# Altium PCB Razvodka.PcbDoc
Units mm, origin at the board's own origin, x right, y up, seen from the top; angles counter-clockwise.
Board outline 149 x 82 mm, 2 copper layers (Top Layer, Bottom Layer); 58 components, 57 nets, 181 pads, 0 vias.
Unrouted connection lines stored in the file: 1.
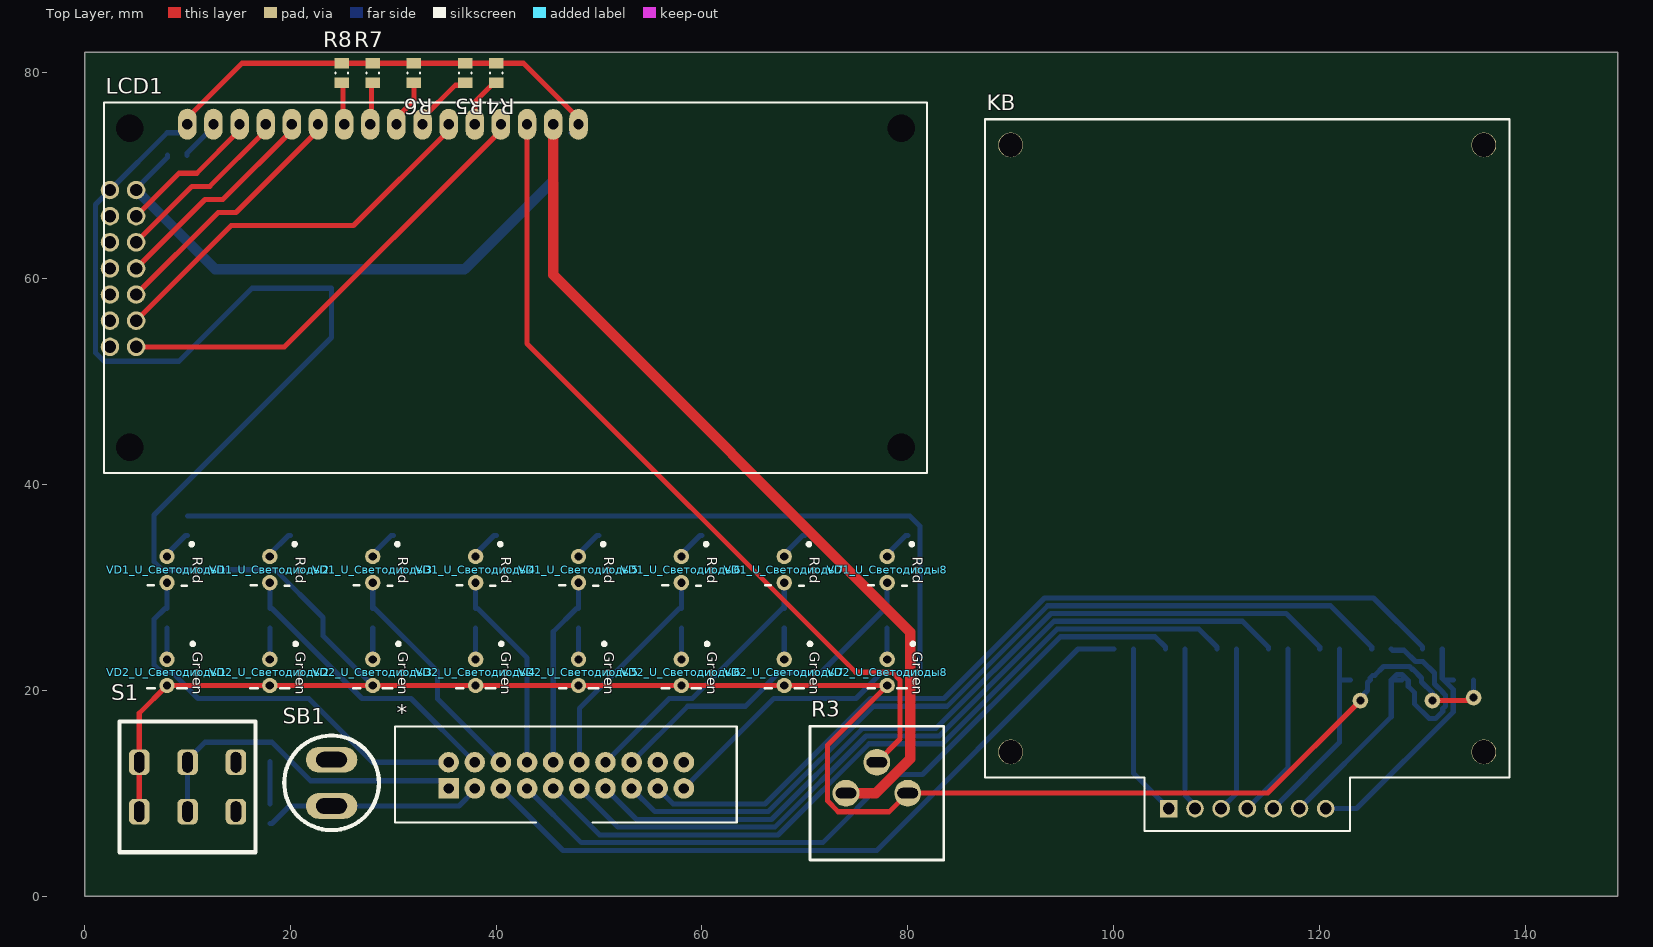
[diagram p0: Top Layer view]
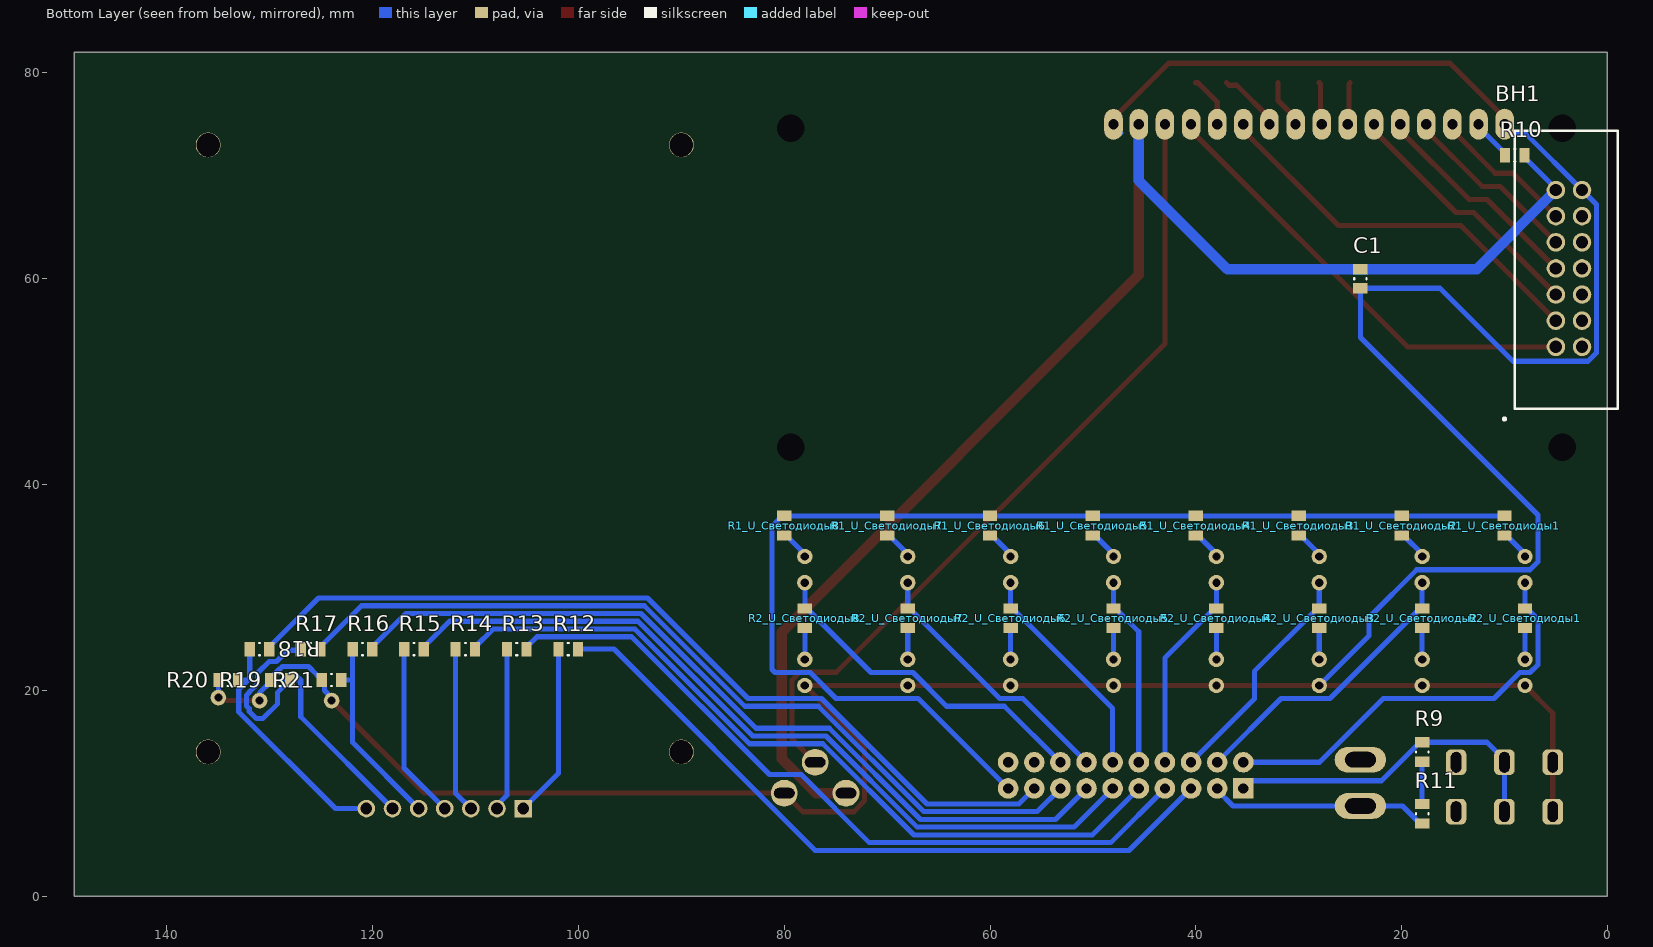
[diagram p1: Bottom Layer view, seen from below]
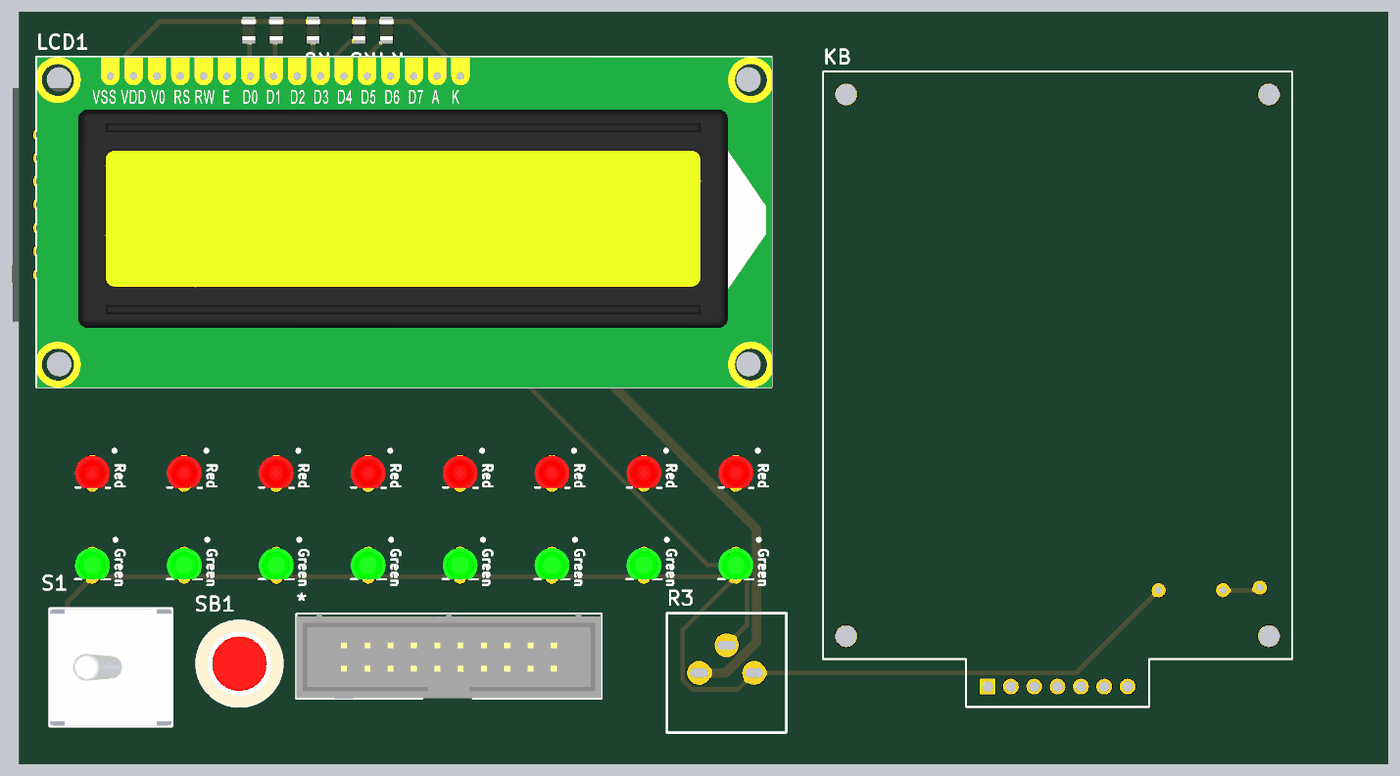
[diagram p2: 3D render of the assembled board from above, using the file's embedded part models]
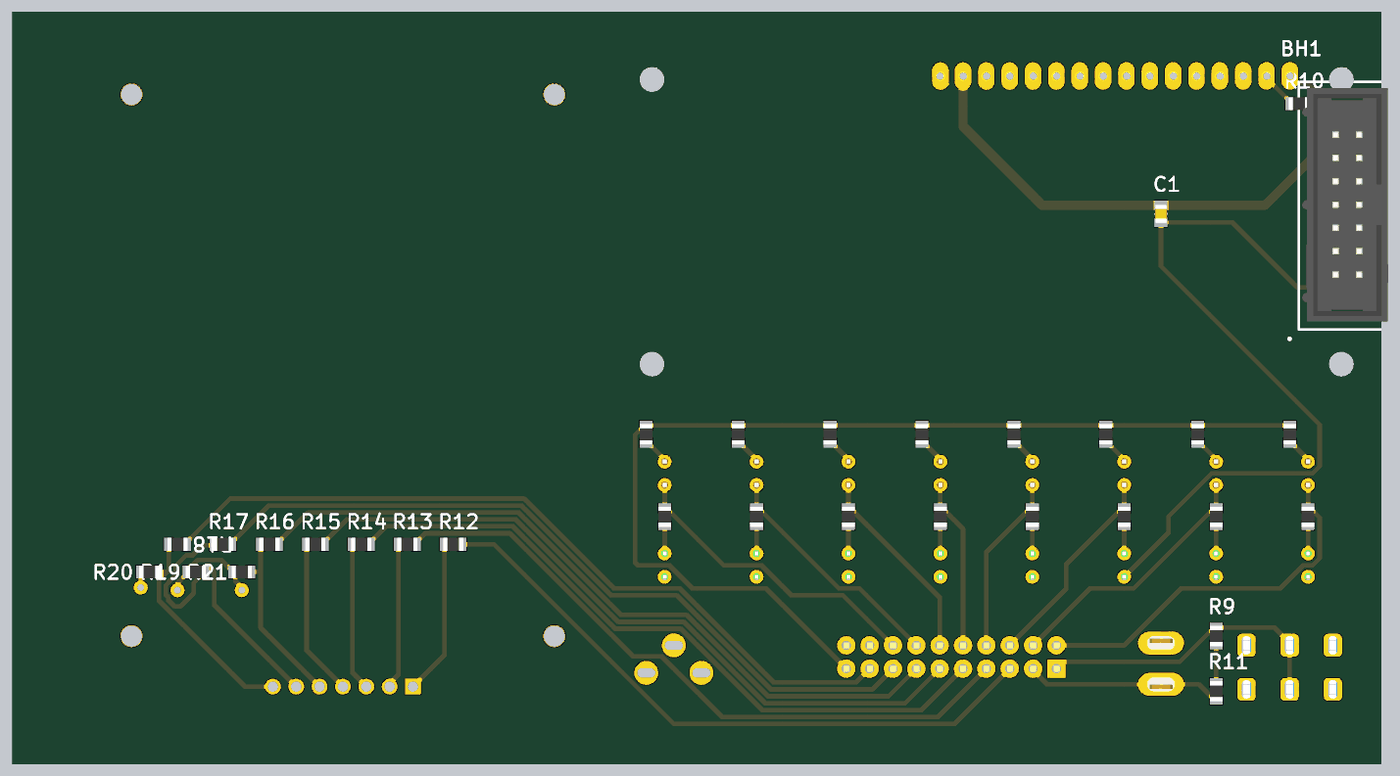
[diagram p3: 3D render of the assembled board from below, using the file's embedded part models]

## Layer stack, top to bottom
Top Solder: solder mask 0.0102, Solder Resist, Dk 3.5
Top Layer: signal copper 0.0356
Dielectric 1: dielectric 0.32, FR-4, Dk 4.8
Bottom Layer: signal copper 0.0356
Bottom Solder: solder mask 0.0102, Solder Resist, Dk 3.5

## Board outline
0,0 0,82 149,82 149,0

## Design rules (kind name [scope] priority, off if disabled: settings)
Clearance [All] p1: gap=0.254 ignorepadtopadclearanceinfootprint=FALSE except(0: Arc-Hole Track-Hole SMDPad-Hole THPad-Hole Via-Hole Fill-Hole Poly-Hole Region-Hole Text-Hole)
Height [All] p1: minheight=0 maxheight=50 prefheight=5
PolygonConnect [All] p1: connectstyle=Relief reliefconductorwidth=0.254 reliefentries=4 polygonreliefangle="90 Angle" airgapwidth=0.254
RoutingVias [All] p1: holewidth=0.711 width=1.27 viastyle="Through Hole" minholewidth=0.711 minwidth=1.27 maxholewidth=0.711 maxwidth=1.27
SolderMaskExpansion [All] p1: expansion=0.102 istentingtop=FALSE
Width [All] p1: maxlimit=1 minlimit=0.254 preferedwidth=0.5 minimp=50.000000 maximp=50.000000 favimp=50.000000
29 further rules are at their usual default settings.

## Classes and differential pairs
channel class Светодиоды: U_Светодиоды1 U_Светодиоды2 U_Светодиоды3 U_Светодиоды4 U_Светодиоды5 U_Светодиоды6 U_Светодиоды7 U_Светодиоды8
component class "Управление (дисплей+клавиатура)": BH1 C1 KB R3 R4 R5 R6 R7 R8 R9 R10 R11 R12 R13 R14 R15 R16 R17 R18 R19 R20 R21 S1 SB1
component class U_Светодиоды8: R1_U_Светодиоды8 R2_U_Светодиоды8 VD1_U_Светодиоды8 VD2_U_Светодиоды8
component class U_Светодиоды7: R1_U_Светодиоды7 R2_U_Светодиоды7 VD1_U_Светодиоды7 VD2_U_Светодиоды7
component class U_Светодиоды6: R1_U_Светодиоды6 R2_U_Светодиоды6 VD1_U_Светодиоды6 VD2_U_Светодиоды6
component class U_Светодиоды5: R1_U_Светодиоды5 R2_U_Светодиоды5 VD1_U_Светодиоды5 VD2_U_Светодиоды5
component class U_Светодиоды4: R1_U_Светодиоды4 R2_U_Светодиоды4 VD1_U_Светодиоды4 VD2_U_Светодиоды4
component class U_Светодиоды3: R1_U_Светодиоды3 R2_U_Светодиоды3 VD1_U_Светодиоды3 VD2_U_Светодиоды3
component class U_Светодиоды2: R1_U_Светодиоды2 R2_U_Светодиоды2 VD1_U_Светодиоды2 VD2_U_Светодиоды2
component class U_Светодиоды1: R1_U_Светодиоды1 R2_U_Светодиоды1 VD1_U_Светодиоды1 VD2_U_Светодиоды1

## Components (designator, comment, footprint, x,y, rotation, side; value= is the part's Value field where it differs from the comment)
* "BH20" IDC20 45.921,15.286 r90 top
BH1 "BH14(1)" "BH-14 (DS1013-14S) (IDC-14MS)" 5,53.38 r90 bottom
C1 "*" C(ceramic) 24,60 r90 bottom
KB "AK-304" AK-304-N-BBW 113,43.5 r0 top
LCD1 "BCB1602" BCB1602 4.38,43.624 r0 top
R1_U_Светодиоды1 "R" R 10,36 r90 bottom (schematic designator R1)
R1_U_Светодиоды2 "R" R 20,36 r90 bottom (schematic designator R1)
R1_U_Светодиоды3 "R" R 30,36 r90 bottom (schematic designator R1)
R1_U_Светодиоды4 "R" R 40,36 r90 bottom (schematic designator R1)
R1_U_Светодиоды5 "R" R 50,36 r90 bottom (schematic designator R1)
R1_U_Светодиоды6 "R" R 60,36 r90 bottom (schematic designator R1)
R1_U_Светодиоды7 "R" R 70,36 r90 bottom (schematic designator R1)
R1_U_Светодиоды8 "R" R 80,36 r90 bottom (schematic designator R1)
R2_U_Светодиоды1 "R" R 8,27 r90 bottom (schematic designator R2)
R2_U_Светодиоды2 "R" R 18,27 r90 bottom (schematic designator R2)
R2_U_Светодиоды3 "R" R 28,27 r90 bottom (schematic designator R2)
R2_U_Светодиоды4 "R" R 38,27 r90 bottom (schematic designator R2)
R2_U_Светодиоды5 "R" R 48,27 r90 bottom (schematic designator R2)
R2_U_Светодиоды6 "R" R 58,27 r90 bottom (schematic designator R2)
R2_U_Светодиоды7 "R" R 68,27 r90 bottom (schematic designator R2)
R2_U_Светодиоды8 "R" R 78,27 r90 bottom (schematic designator R2)
R3 "" R(подстр) 77,10 r0 top
R4 "*" R 40,80 r90 top
R5 "*" R 37,80 r90 top
R6 "*" R 32,80 r90 top
R7 "*" R 28,80 r90 top
R8 "*" R 25,80 r90 top
R9 "R" R 18,14 r90 bottom
R10 "*" R 9,72 r180 bottom
R11 "*" R 18,8 r270 bottom
R12 "R" R 101,24 r0 bottom
R13 "R" R 106,24 r0 bottom
R14 "R" R 111,24 r0 bottom
R15 "R" R 116,24 r0 bottom
R16 "R" R 121,24 r0 bottom
R17 "R" R 126.05,24 r0 bottom
R18 "R" R 131,24 r0 bottom
R19 "R" R 129,21 r180 bottom
R20 "R" R 134.05,21 r180 bottom
R21 "R" R 124,21 r180 bottom
S1 "(?)тумблер" MTS-2 10,10.6 r90 top
SB1 "ПУСК" кнопка 24,11 r0 top
VD1_U_Светодиоды1 "L-934(RED)" L-934(RED) 8,33 r270 top (schematic designator VD1)
VD1_U_Светодиоды2 "L-934(RED)" L-934(RED) 18,33 r270 top (schematic designator VD1)
VD1_U_Светодиоды3 "L-934(RED)" L-934(RED) 28,33 r270 top (schematic designator VD1)
VD1_U_Светодиоды4 "L-934(RED)" L-934(RED) 38,33 r270 top (schematic designator VD1)
VD1_U_Светодиоды5 "L-934(RED)" L-934(RED) 48,33 r270 top (schematic designator VD1)
VD1_U_Светодиоды6 "L-934(RED)" L-934(RED) 58,33 r270 top (schematic designator VD1)
VD1_U_Светодиоды7 "L-934(RED)" L-934(RED) 68,33 r270 top (schematic designator VD1)
VD1_U_Светодиоды8 "L-934(RED)" L-934(RED) 78,33 r270 top (schematic designator VD1)
VD2_U_Светодиоды1 "L-934(GREEN)" L-934(GREEN) 8,23 r270 top (schematic designator VD2)
VD2_U_Светодиоды2 "L-934(GREEN)" L-934(GREEN) 18,23 r270 top (schematic designator VD2)
VD2_U_Светодиоды3 "L-934(GREEN)" L-934(GREEN) 28,23 r270 top (schematic designator VD2)
VD2_U_Светодиоды4 "L-934(GREEN)" L-934(GREEN) 38,23 r270 top (schematic designator VD2)
VD2_U_Светодиоды5 "L-934(GREEN)" L-934(GREEN) 48,23 r270 top (schematic designator VD2)
VD2_U_Светодиоды6 "L-934(GREEN)" L-934(GREEN) 58,23 r270 top (schematic designator VD2)
VD2_U_Светодиоды7 "L-934(GREEN)" L-934(GREEN) 68,23 r270 top (schematic designator VD2)
VD2_U_Светодиоды8 "L-934(GREEN)" L-934(GREEN) 78,23 r270 top (schematic designator VD2)

## Footprints (in the part's own frame and the unit in brackets; to place one, negate y for a bottom-side part, rotate by r counter-clockwise, add the part's x,y. Pads: shape width x height; smd on the part's side, far side on the other; paste and mask are expansions set on the pad)
AK-304-N-BBW [mm]
  rect 1.71x1.71 hole 1.14: 1(-7.62,-35)
  round 1.71 hole 1.14: 2(-5.08,-35) 3(-2.54,-35) 4(0,-35) 5(2.54,-35) 6(5.08,-35) 7(7.62,-35)
  round 2.4 hole 2.3 unplated: ""(-23,-29.5) ""(-23,29.5) ""(23,-29.5) ""(23,29.5)
  silkscreen extent -25.5,-37.2 25.5,32
BCB1602 [mm]
  oval 1.8x3 hole 1: 1(43.62,31.376) 2(41.16,31.377) 3(38.62,31.379) 4(36.08,31.381) 5(33.54,31.382) 6(31,31.384) 7(28.46,31.385) 8(25.92,31.387) 9(23.38,31.389) 10(20.84,31.39) 11(18.3,31.392) 12(15.76,31.394) 13(13.22,31.395) 14(10.68,31.397) 15(8.14,31.398) 16(5.6,31.4)
  round 2.5 hole 2.7 unplated: *(0,0) *(0,31) *(75,0) *(75,31)
  silkscreen extent -2.5,-2.5 77.5,33.5, body extent -2.43,-2.55 77.57,33.45, height 17.05
"BH-14 (DS1013-14S) (IDC-14MS)" [mm]
  round 1.8 hole 1.2: 1(0,0) 2(2.54,0) 3(5.08,0) 4(7.62,0) 5(10.16,0) 6(12.7,0) 7(15.24,0) 8(0,-2.54) 9(2.54,-2.54) 10(5.08,-2.54) 11(7.62,-2.54) 12(10.16,-2.54) 13(12.7,-2.54) 14(15.24,-2.54)
  silkscreen extent -7.12,-6 21,5.13, body extent -5.1,-5.7 20.3,3.65, height 10.25
C(ceramic) [mm] "Chip Capacitor, 2-Leads, Body 2,00x1,25mm, IPC Medium Density"
  rect 1x1.4 smd: 1(-0.925,0) 2(0.925,0)
  silkscreen extent -0.05,-0.6 0.05,0.6, body extent -1,-0.63 1,0.63, height 1.3
IDC20 [mm]
  rect 2x2 hole 1: 1(-4.826,10.541)
  round 2 hole 1: 2(-4.826,8.001) 3(-4.826,5.461) 4(-4.826,2.921) 5(-4.826,0.381) 6(-4.826,-2.159) 7(-4.826,-4.699) 8(-4.826,-7.239) 9(-4.826,-9.779) 10(-4.826,-12.319) 11(-2.286,10.541) 12(-2.286,8.001) 13(-2.286,5.461) 14(-2.286,2.921) 15(-2.286,0.381) 16(-2.286,-2.159) 17(-2.286,-4.699) 18(-2.286,-7.239) 19(-2.286,-9.779) 20(-2.286,-12.319)
  silkscreen extent -8.13,-17.46 1.17,15.74, body extent -8.13,-17.46 1.17,15.74, height 9.1
L-934(GREEN) [mm]
  round 1.5 hole 0.8: 1(0,0) 2(2.54,0)
  silkscreen extent -1.64,-1.89 2.81,2.64, body extent -0.61,-1.9 2.81,1.9, height 5.64
L-934(RED) [mm]
  round 1.5 hole 0.8: 1(0,0) 2(2.54,0)
  silkscreen extent -1.34,-1.85 2.85,2.54, body extent -0.65,-1.9 2.85,1.9, height 6
MTS-2 [mm]
  rrect50% 2.5x2 hole 1 slot 2 at 0 deg: 1(-2.4,4.7) 1(2.4,4.7) 2(-2.4,0) 2(2.4,0) 3(-2.4,-4.7) 3(2.4,-4.7)
  silkscreen extent -6.35,-6.6 6.35,6.6, body extent -6.35,-6.6 6.35,6.6, height 29.34
R [mm] "Chip Resistor, 2-Leads, Body 2,10x1,30mm, IPC Medium Density"
  rect 1x1.4 smd: 1(-0.95,0) 2(0.95,0)
  silkscreen extent -0.05,-0.6 0.05,0.6, body extent -1.1,-0.7 1.1,0.7, height 0.6
R(подстр) [mm]
  round 2.6 hole 1 slot 2 at 0 deg: 1(-3,0) 2(3,0) 3(0,3)
  silkscreen extent -6.5,-6.5 6.5,6.5, body extent -6.5,-6.3 6.3,6.5, height 6
кнопка [mm]
  oval 5x2.5 hole 1.5 slot 3 at 0 deg: 1(0,2.25) 2(0,-2.25)
  silkscreen extent -4.6,-4.6 4.6,4.6, body extent -4.75,-4.75 4.75,4.75, height 22.6

## Part data
BH1: library part BH14(3)
C1: library part C(ceramic)
R3: library part R(подстр)
R4 R5 R6 R7 R8 R10 R11: library part R
SB1: library part кнопка

## Free pads (board coordinates)
  round 1.524 hole 0.762: 5(124,19) 6(131,19) 7(135,19.293)

## Nets (pads, with @x,y where several pads share a name; then routed paths per layer and width w, separated by ;. In a path a pad name is that pad's centre, name@x,y a point inside that pad or via, vN(x,y) a via of type N, cw(c..) or ccw(c..) an arc to the next point about the centre after c; other vN are vias at no path point)
+3.3: R9.1 R11.1 | length 4.1
  Bottom Layer w0.5: R11.1@18,8.963 R9.1
+5: BH1.7 C1.2 LCD1.2 R3.1 R10.2 | length 141.1
  Top Layer w1: LCD1.2 45.54,60.374 80.258,25.656 80.258,13.353 76.905,10 R3.1
  Bottom Layer w0.5: BH1.7 5,68.75 8.05,71.8 R10.2
  Bottom Layer w1: BH1.7 12.695,60.925 C1.2 36.925,60.925 45.54,69.54 LCD1.2
GND: BH1.14 C1.1 LCD1.1 LCD1.16 pad.5 pad.6 pad.7 R3.2 R4.2 R5.2 R6.2 R7.2 R8.2 R19.1 R20.1 R21.1 S1.1 SB1.1 VD2_U_Светодиоды1.2 VD2_U_Светодиоды2.2 VD2_U_Светодиоды3.2 VD2_U_Светодиоды4.2 VD2_U_Светодиоды5.2 VD2_U_Светодиоды6.2 VD2_U_Светодиоды7.2 VD2_U_Светодиоды8.2 | length 331.4
  Top Layer w0.5: S1.1@5.3,8.2 5.3,13 5.3,17.76 VD2_U_Светодиоды1.2 VD2_U_Светодиоды2.2 VD2_U_Светодиоды3.2 VD2_U_Светодиоды4.2 VD2_U_Светодиоды5.2 VD2_U_Светодиоды6.2 VD2_U_Светодиоды7.2 VD2_U_Светодиоды8.2 72.196,14.656 72.196,9.253 73.253,8.196 78.196,8.196 R3.2 115,10 pad.5 ; LCD1.16@9.446,74.49 LCD1.16 9.98,75.624 15.306,80.95 R8.2 R7.2 R6.2 R5.2 R4.2 42.65,80.95 48,75.6 LCD1.1 ; pad.6 134.707,19 pad.7
  Bottom Layer w0.5: LCD1.16@9.98,75.624 LCD1.16 9.98,74.793 9.379,74.193 8.033,74.193 BH1.14 1.056,67.216 1.056,52.798 1.878,51.976 9.165,51.976 16.264,59.075 C1.1 24,54.28 6.746,37.026 6.746,32.481 7.513,31.714 18.519,31.714 23.164,27.069 23.164,25.296 VD2_U_Светодиоды3.2 ; LCD1.1@47.301,74.151 47.399,74.151 48,74.752 LCD1.1 LCD1.1@48,75.6 ; pad.5 124,19.277 124.7,19.977 124.7,20.75 R21.1 124.95,21.2 125.2,21.45 125.4,21.45 126.246,22.296 128.775,22.296 129.029,22.042 129.108,22.042 129.95,21.2 R19.1 129.95,20.8 131,19.75 pad.6 ; pad.7 R20.1
Net*_1: *.1 R9.2 S1.2 | length 33
  Bottom Layer w0.5: S1.2@10,8.2 10,13 10,13.25 11.7,14.95 R9.2 18.2,14.95 21.94,11.21 34.63,11.21 *.1
Net*_2: *.2 R11.2 SB1.2 | length 21.4
  Bottom Layer w0.5: R11.2 18.2,7.05 19.9,8.75 SB1.2 36.383,8.75 37.92,10.287 *.2
Net*_3: *.3 R12.1 | length 70.2
  Bottom Layer w0.5: *.3 46.488,4.432 76.983,4.432 96.551,24 R12.1
Net*_4: *.4 R13.1 | length 73.1
  Bottom Layer w0.5: *.4 48.274,5.186 71.737,5.186 78.355,11.804 81.449,11.804 94.849,25.204 104.046,25.204 105.05,24.2 R13.1
Net*_5: *.5 R14.1 | length 75.6
  Bottom Layer w0.5: *.5 50.06,5.94 67.389,5.94 76.253,14.804 83.383,14.804 94.537,25.958 108.292,25.958 110.05,24.2 R14.1
Net*_6: *.6 R15.1 | length 78.1
  Bottom Layer w0.5: *.6 51.846,6.694 67.076,6.694 75.941,15.558 83.07,15.558 94.224,26.712 112.538,26.712 115.05,24.2 R15.1
Net*_7: *.7 R16.1 | length 80.5
  Bottom Layer w0.5: *.7 53.632,7.448 66.764,7.448 75.628,16.312 82.758,16.312 93.912,27.466 116.784,27.466 120.05,24.2 R16.1
Net*_8: *.8 R17.1 | length 83
  Bottom Layer w0.5: *.8 55.418,8.202 66.452,8.202 76.702,18.452 83.832,18.452 93.6,28.22 121.08,28.22 125.1,24.2 R17.1
Net*_9: *.9 R18.1 | length 85.4
  Bottom Layer w0.5: *.9 57.204,8.956 66.14,8.956 76.39,19.206 83.519,19.206 93.287,28.974 125.276,28.974 130.05,24.2 R18.1
NetBH1_1: BH1.1 LCD1.4 | length 44.8
  Top Layer w0.5: BH1.1 19.435,53.38 40.46,74.405 LCD1.4
NetBH1_2: BH1.2 LCD1.6 | length 38.6
  Top Layer w0.5: BH1.2 14.244,65.164 26.136,65.164 35.38,74.408 LCD1.6
NetBH1_3: BH1.3 LCD1.11 | length 24.9
  Top Layer w0.5: BH1.3 12.978,66.438 14.702,66.438 22.68,74.416 LCD1.11
NetBH1_4: BH1.4 LCD1.12 | length 21.3
  Top Layer w0.5: BH1.4 11.709,67.709 13.431,67.709 20.14,74.418 LCD1.12
NetBH1_5: BH1.5 LCD1.13 | length 17.7
  Top Layer w0.5: BH1.5 10.44,68.98 12.16,68.98 17.6,74.419 LCD1.13
NetBH1_6: BH1.6 LCD1.14 | length 14.1
  Top Layer w0.5: BH1.6 9.17,70.25 10.89,70.25 15.06,74.421 LCD1.14
NetKB_1: KB.1 R12.2 | length 16.9
  Bottom Layer w0.5: R12.2 101.95,11.93 KB.1
NetKB_2: KB.2 R13.2 | length 15.9
  Bottom Layer w0.5: R13.2 106.95,9.797 107.92,8.827 KB.2
NetKB_3: KB.3 R14.2 | length 16.1
  Bottom Layer w0.5: KB.3 111.95,9.99 R14.2
NetKB_4: KB.4 R15.2 | length 17.1
  Bottom Layer w0.5: KB.4 116.95,12.45 R15.2
NetKB_5: KB.5 R16.2 R21.2 | length 19.3
  Bottom Layer w0.5: KB.5 121.95,14.91 121.95,21 ; R16.2 121.95,21 ; R21.2 121.95,21
NetKB_6: KB.6 R17.2 R19.2 | length 35
  Bottom Layer w0.5: KB.6 127,17.42 127,21 ; R17.2 127.113,23.887 128.25,23.887 129.341,22.796 130.067,22.796 131.196,21.667 131.196,20.62 132,19.816 132,19.79 132.266,19.524 132.266,18.476 132,18.21 132,17.934 131.312,17.246 130.688,17.246 129.241,18.692 129.241,19.796 128.646,20.392 128.646,20.946 128.05,21.542 127.542,21.542 127,21 ; R19.2 127,21
NetKB_7: KB.7 R18.2 R20.2 | length 23.8
  Bottom Layer w0.5: KB.7 123.633,8.5 133.02,17.887 133.02,20.063 131.95,21.133 R18.2 ; 132.083,21 R20.2@133.05,21
NetLCD1_3: LCD1.3 R3.3 | length 80
  Top Layer w0.5: LCD1.3 43,53.687 74.941,21.746 78.487,21.746 79.254,20.979 79.254,15.254 R3.3
NetLCD1_5: LCD1.5 R4.1 | length 5.6
  Top Layer w0.5: LCD1.5 37.92,77.17 39.8,79.05 R4.1
  Bottom Layer w0.5: LCD1.5@37.92,74.406 LCD1.5
NetLCD1_7: LCD1.7 R5.1 | length 6.3
  Top Layer w0.5: LCD1.7 32.84,75.61 36.03,78.8 36.75,78.8 R5.1
  Bottom Layer w0.5: LCD1.7 LCD1.7@32.92,74.93
NetLCD1_8: LCD1.8 R6.1 | length 5
  Top Layer w0.5: LCD1.8 30.3,75.611 32,77.311 R6.1
  Bottom Layer w0.5: LCD1.8@30.15,74.861 LCD1.8
NetLCD1_9: LCD1.9 R7.1 | length 5.1
  Top Layer w0.5: LCD1.9 27.88,75.133 27.88,78.93 R7.1
  Bottom Layer w0.5: LCD1.9@27.76,74.061 LCD1.9
NetLCD1_10: LCD1.10 R8.1 | length 4.7
  Top Layer w0.5: R8.1 25.11,78.94 25.11,75.125 LCD1.10
  Bottom Layer w0.5: LCD1.10@25.22,74.415 LCD1.10
NetLCD1_15: LCD1.15 R10.1 | length 4.1
  Bottom Layer w0.5: R10.1 9.95,72.2 12.52,74.77 LCD1.15
NetR1_U_Светодиоды1_1: R1_U_Светодиоды1.1 VD1_U_Светодиоды1.1 | length 3
  Bottom Layer w0.5: VD1_U_Светодиоды1.1 8,33.25 9.8,35.05 R1_U_Светодиоды1.1
NetR1_U_Светодиоды2_1: R1_U_Светодиоды2.1 VD1_U_Светодиоды2.1 | length 3
  Bottom Layer w0.5: VD1_U_Светодиоды2.1 18,33.25 19.8,35.05 R1_U_Светодиоды2.1
NetR1_U_Светодиоды3_1: R1_U_Светодиоды3.1 VD1_U_Светодиоды3.1 | length 3
  Bottom Layer w0.5: VD1_U_Светодиоды3.1 28,33.25 29.8,35.05 R1_U_Светодиоды3.1
NetR1_U_Светодиоды4_1: R1_U_Светодиоды4.1 VD1_U_Светодиоды4.1 | length 3
  Bottom Layer w0.5: VD1_U_Светодиоды4.1 38,33.25 39.8,35.05 R1_U_Светодиоды4.1
NetR1_U_Светодиоды5_1: R1_U_Светодиоды5.1 VD1_U_Светодиоды5.1 | length 3
  Bottom Layer w0.5: VD1_U_Светодиоды5.1 48,33.25 49.8,35.05 R1_U_Светодиоды5.1
NetR1_U_Светодиоды6_1: R1_U_Светодиоды6.1 VD1_U_Светодиоды6.1 | length 3
  Bottom Layer w0.5: VD1_U_Светодиоды6.1 58,33.25 59.8,35.05 R1_U_Светодиоды6.1
NetR1_U_Светодиоды7_1: R1_U_Светодиоды7.1 VD1_U_Светодиоды7.1 | length 3
  Bottom Layer w0.5: VD1_U_Светодиоды7.1 68,33.25 69.8,35.05 R1_U_Светодиоды7.1
NetR1_U_Светодиоды8_1: R1_U_Светодиоды8.1 VD1_U_Светодиоды8.1 | length 3
  Bottom Layer w0.5: VD1_U_Светодиоды8.1 78,33.25 79.8,35.05 R1_U_Светодиоды8.1
NetR2_U_Светодиоды1_1: R2_U_Светодиоды1.1 VD2_U_Светодиоды1.1 | length 3.1
  Bottom Layer w0.5: VD2_U_Светодиоды1.1 R2_U_Светодиоды1.1
NetR2_U_Светодиоды2_1: R2_U_Светодиоды2.1 VD2_U_Светодиоды2.1 | length 3
  Bottom Layer w0.5: VD2_U_Светодиоды2.1 R2_U_Светодиоды2.1
NetR2_U_Светодиоды3_1: R2_U_Светодиоды3.1 VD2_U_Светодиоды3.1 | length 3
  Bottom Layer w0.5: VD2_U_Светодиоды3.1 R2_U_Светодиоды3.1
NetR2_U_Светодиоды4_1: R2_U_Светодиоды4.1 VD2_U_Светодиоды4.1 | length 3
  Bottom Layer w0.5: VD2_U_Светодиоды4.1 R2_U_Светодиоды4.1
NetR2_U_Светодиоды5_1: R2_U_Светодиоды5.1 VD2_U_Светодиоды5.1 | length 3
  Bottom Layer w0.5: VD2_U_Светодиоды5.1 R2_U_Светодиоды5.1
NetR2_U_Светодиоды6_1: R2_U_Светодиоды6.1 VD2_U_Светодиоды6.1 | length 3
  Bottom Layer w0.5: VD2_U_Светодиоды6.1 R2_U_Светодиоды6.1
NetR2_U_Светодиоды7_1: R2_U_Светодиоды7.1 VD2_U_Светодиоды7.1 | length 3
  Bottom Layer w0.5: VD2_U_Светодиоды7.1 R2_U_Светодиоды7.1
NetR2_U_Светодиоды8_1: R2_U_Светодиоды8.1 VD2_U_Светодиоды8.1 | length 3.1
  Bottom Layer w0.5: VD2_U_Светодиоды8.1 R2_U_Светодиоды8.1
ГБ1: *.11 R2_U_Светодиоды1.2 VD1_U_Светодиоды1.2 | length 41.2
  Bottom Layer w0.5: VD1_U_Светодиоды1.2 R2_U_Светодиоды1.2 7.8,27.95 6.746,26.896 6.746,22.481 7.513,21.714 8.519,21.714 11.027,19.206 21.775,19.206 27.981,13 *.11
ГБ2: *.12 R2_U_Светодиоды2.2 VD1_U_Светодиоды2.2 | length 28.6
  Bottom Layer w0.5: VD1_U_Светодиоды2.2 R2_U_Светодиоды2.2 18.2,27.95 26.944,19.206 31.714,19.206 *.12
ГБ3: *.13 R2_U_Светодиоды3.2 VD1_U_Светодиоды3.2 | length 22.7
  Bottom Layer w0.5: VD1_U_Светодиоды3.2 R2_U_Светодиоды3.2 28.2,27.95 34.311,21.839 34.311,19.149 *.13
ГБ4: *.14 R2_U_Светодиоды4.2 VD1_U_Светодиоды4.2 | length 19.6
  Bottom Layer w0.5: VD1_U_Светодиоды4.2 R2_U_Светодиоды4.2 38.2,27.95 43,23.15 *.14
ГБ5: *.15 R2_U_Светодиоды5.2 VD1_U_Светодиоды5.2 | length 18.6
  Bottom Layer w0.5: *.15 45.54,25.69 47.8,27.95 R2_U_Светодиоды5.2 VD1_U_Светодиоды5.2
ГБ6: *.16 R2_U_Светодиоды6.2 VD1_U_Светодиоды6.2 | length 21.7
  Bottom Layer w0.5: *.16 48.08,18.23 57.8,27.95 R2_U_Светодиоды6.2 VD1_U_Светодиоды6.2
ГБ7: *.17 R2_U_Светодиоды7.2 VD1_U_Светодиоды7.2 | length 26.1
  Bottom Layer w0.5: *.17 56.826,19.206 59.056,19.206 67.8,27.95 R2_U_Светодиоды7.2 VD1_U_Светодиоды7.2
ГБ8: *.18 R2_U_Светодиоды8.2 VD1_U_Светодиоды8.2 | length 33.5
  Bottom Layer w0.5: *.18 58.612,18.452 64.219,18.452 67.481,21.714 71.564,21.714 77.8,27.95 R2_U_Светодиоды8.2 VD1_U_Светодиоды8.2
РИ: *.10 R1_U_Светодиоды1.2 R1_U_Светодиоды2.2 R1_U_Светодиоды3.2 R1_U_Светодиоды4.2 R1_U_Светодиоды5.2 R1_U_Светодиоды6.2 R1_U_Светодиоды7.2 R1_U_Светодиоды8.2 | length 113.3
  Bottom Layer w0.5: R1_U_Светодиоды1.2 R1_U_Светодиоды2.2 R1_U_Светодиоды3.2 R1_U_Светодиоды4.2 R1_U_Светодиоды5.2 R1_U_Светодиоды6.2 R1_U_Светодиоды7.2 R1_U_Светодиоды8.2 80.2,36.95 81.204,35.946 81.204,22.007 80.911,21.714 77.481,21.714 74.973,19.206 66.986,19.206 *.10
pads on no net: *.19 *.20 BH1.8 BH1.9 BH1.10 BH1.11 BH1.12 BH1.13 KB. LCD1.* S1.3

## Silkscreen, mask and mechanical layers (free items; w line width, h text height)
Mechanical 1:
  lines w0.254: 0,0 112.5,0 113,0 138,0 149,0 149,82 138,82 0,82 0,77 0,60 0,0

## Text inside footprints (layer, text, board x,y; h text height)
VD1_U_Светодиоды1: Top Overlay "Red" at 10.5,33 h1 r270
VD1_U_Светодиоды2: Top Overlay "Red" at 20.5,33 h1 r270
VD1_U_Светодиоды3: Top Overlay "Red" at 30.5,33 h1 r270
VD1_U_Светодиоды4: Top Overlay "Red" at 40.5,33 h1 r270
VD1_U_Светодиоды5: Top Overlay "Red" at 50.5,33 h1 r270
VD1_U_Светодиоды6: Top Overlay "Red" at 60.5,33 h1 r270
VD1_U_Светодиоды7: Top Overlay "Red" at 70.5,33 h1 r270
VD1_U_Светодиоды8: Top Overlay "Red" at 80.5,33 h1 r270
VD2_U_Светодиоды1: Top Overlay "Green" at 10.5,23.75 h1 r270
VD2_U_Светодиоды2: Top Overlay "Green" at 20.5,23.75 h1 r270
VD2_U_Светодиоды3: Top Overlay "Green" at 30.5,23.75 h1 r270
VD2_U_Светодиоды4: Top Overlay "Green" at 40.5,23.75 h1 r270
VD2_U_Светодиоды5: Top Overlay "Green" at 50.5,23.75 h1 r270
VD2_U_Светодиоды6: Top Overlay "Green" at 60.5,23.75 h1 r270
VD2_U_Светодиоды7: Top Overlay "Green" at 70.5,23.75 h1 r270
VD2_U_Светодиоды8: Top Overlay "Green" at 80.5,23.75 h1 r270